# Altium PCB PCB1.PcbDoc
Units mm, origin at the board's own origin, x right, y up, seen from the top; angles counter-clockwise.
Board outline 35.13 x 36.25 mm, 4 copper layers (L1(Signal), L2(GND), L3(GND), L4(Signal)), stack 1.57 mm thick; 35 components, 27 nets, 170 pads, 61 vias.
Unrouted connection lines stored in the file: 2.
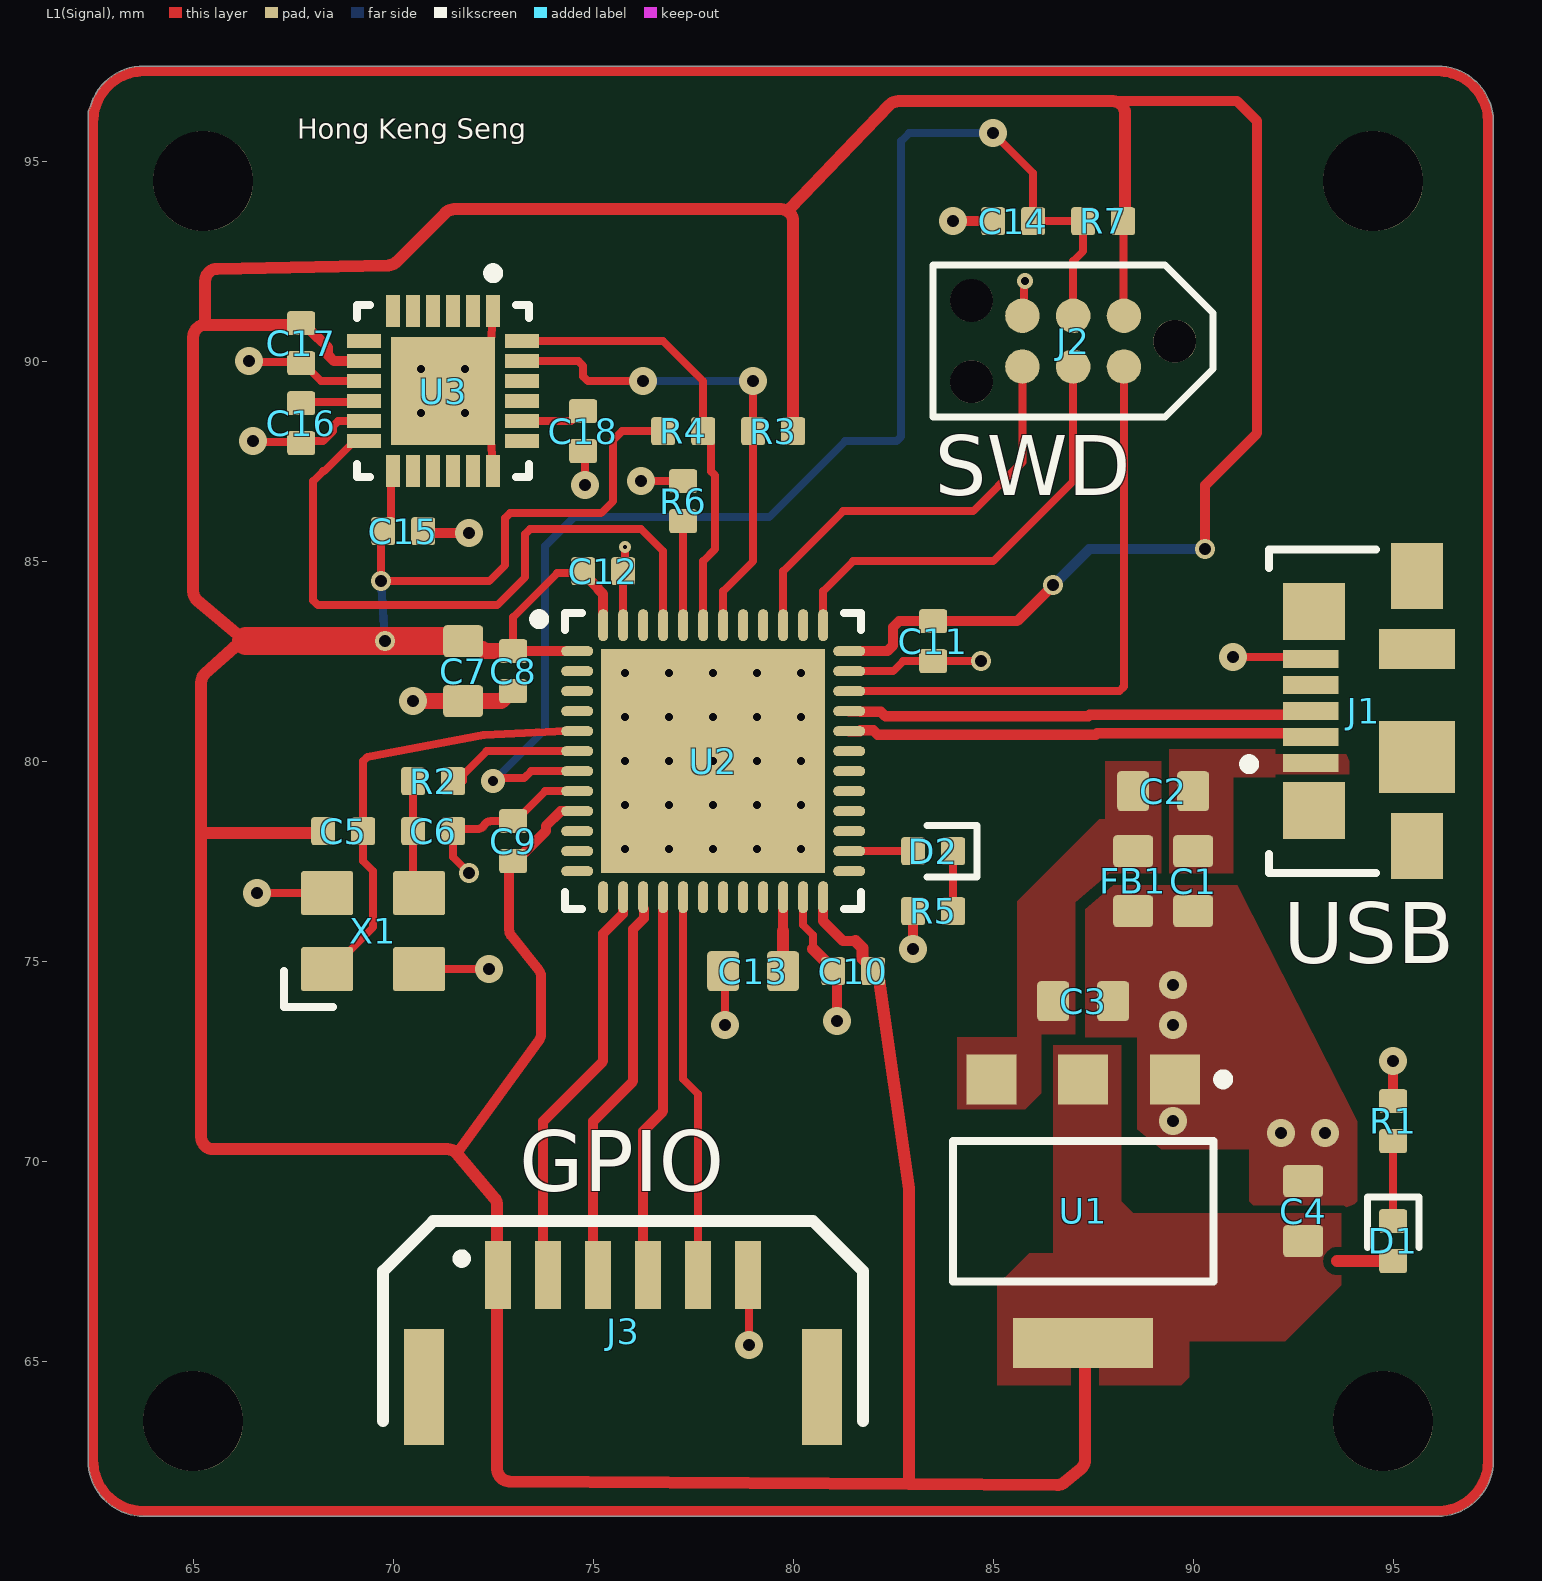
[diagram p0: L1(Signal) view]
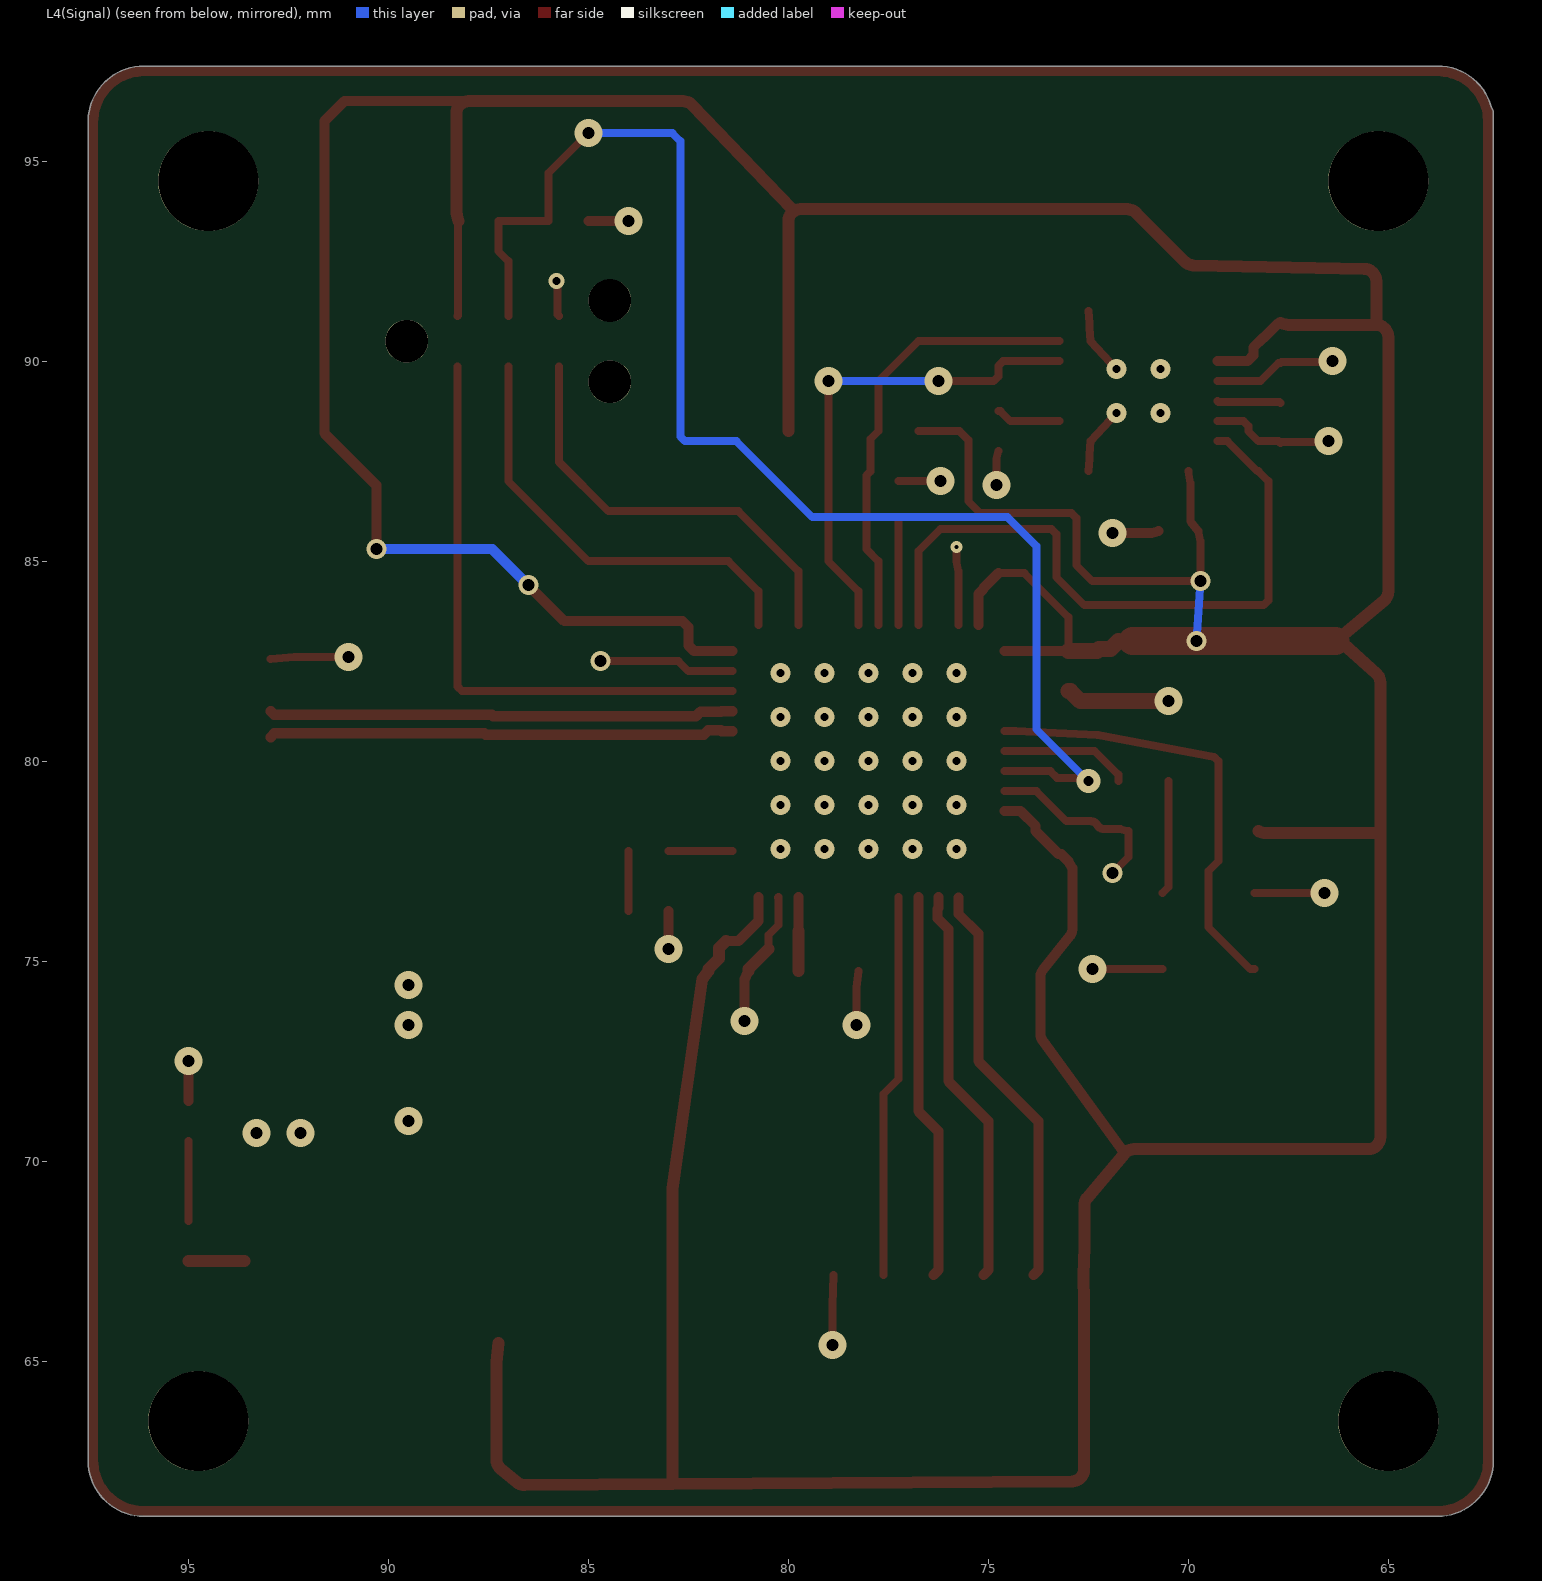
[diagram p1: L4(Signal) view, seen from below]
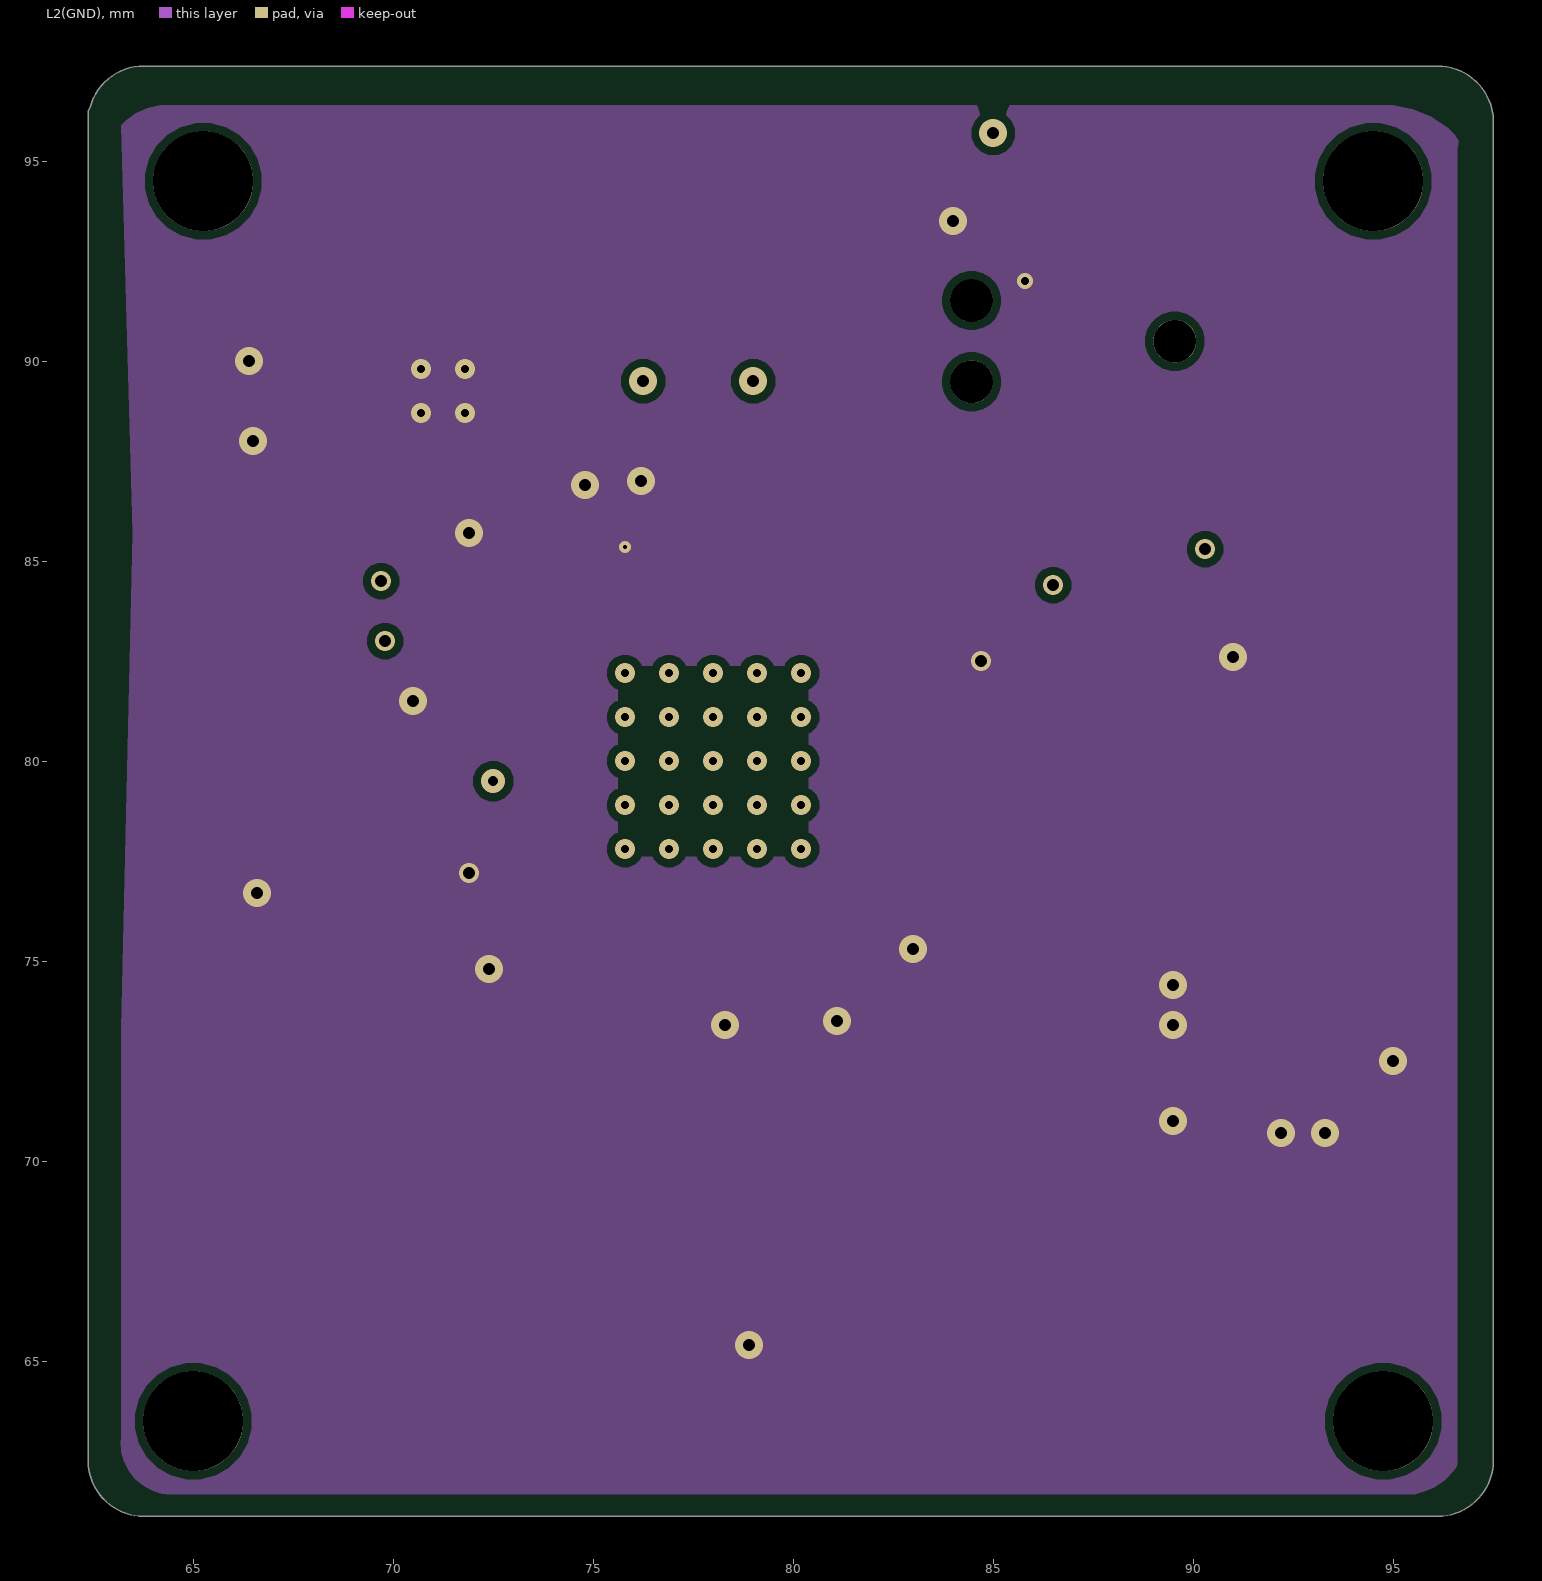
[diagram p2: L2(GND)]
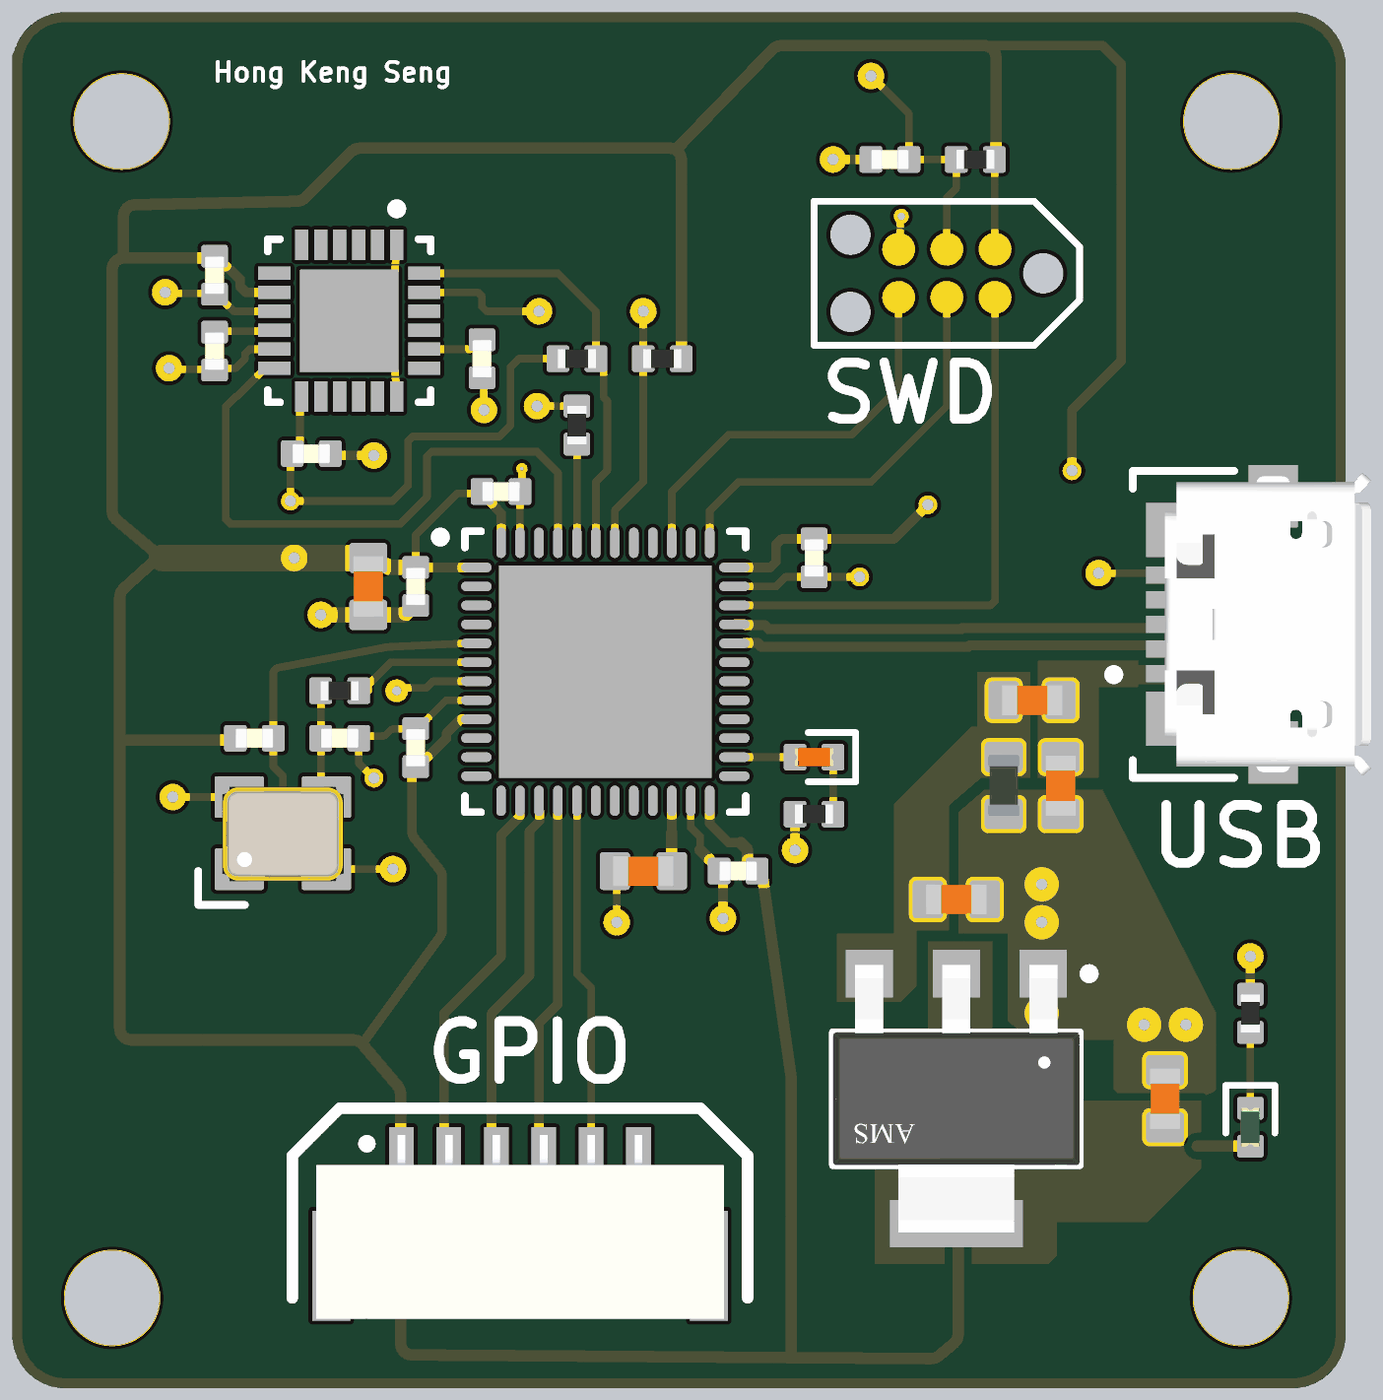
[diagram p3: 3D render of the assembled board from above, using the file's embedded part models]

## Layer stack, top to bottom
Top Solder: solder mask 0.0254, SM-001, Dk 4
L1(Signal): signal copper 0.035
Dielectric 1: prepreg 0.2, PP-017, Dk 4.6
L2(GND): signal copper 0.0175
Dielectric 3: core 1.065, Core-039, Dk 4.6
L3(GND): signal copper 0.0175
Dielectric 5: prepreg 0.2, PP-017, Dk 4.6
L4(Signal): signal copper 0.035
Bottom Solder: solder mask 0.0254, SM-001, Dk 4

## Board outline
62.373,62.52 ccw(c63.77,62.52) 63.77,61.123 96.108,61.123 ccw(c96.108,62.52) 97.505,62.52 97.505,96.128 97.49,96.189 ccw(c96.108,95.98) 96.108,97.377 63.77,97.377 ccw(c63.77,95.98) 62.423,96.351 62.373,96.25

## Design rules (kind name [scope] priority, off if disabled: settings)
Clearance [All] p1: gap=0.2 ignorepadtopadclearanceinfootprint=FALSE
DiffPairsRouting [All] p1: maxlimit=0.254 minlimit=0.203 mostfreqgap=0.254 toplayer_maxgap=0.203 toplayer_prefgap=0.203 toplayer_minwidth=0.26 toplayer_maxwidth=0.26 toplayer_prefwidth=0.26 bottomlayer_maxgap=0.203 bottomlayer_prefgap=0.203 bottomlayer_minwidth=0.26 bottomlayer_maxwidth=0.26 bottomlayer_prefwidth=0.26 impedanceprofiledriven=TRUE impedanceprofileid={DF539FB5-5800-4B12-9F68-A5705F1CF502} impedanceprofilevalue=90.000000 maxuncoupledlength=12.7
PolygonConnect [All] p1: connectstyle=Direct reliefconductorwidth=0.254 reliefentries=4 polygonreliefangle="90 Angle" airgapwidth=0.254
RoutingVias [All] p1: holewidth=0.3 width=0.7 viastyle="Through Hole" minholewidth=0.25 minwidth=0.55 maxholewidth=0.4 maxwidth=0.9
SolderMaskExpansion [All] p1: expansion=0.102 istentingtop=FALSE
SupplyNets "Schematic Supply Nets_3" [InNet('GND')] p1: voltage=0.000
SupplyNets "Schematic Supply Nets_2" [InNet('+5V')] p2: voltage=0.000
SupplyNets "Schematic Supply Nets_1" [InNet('VBUS')] p3: voltage=0.000
SupplyNets "Schematic Supply Nets" [InNet('+3V3')] p4: voltage=0.000
UnRoutedNet [All] p1: checkbadconnections=TRUE
Width [All] p1: maxlimit=1 minlimit=0.2 preferedwidth=0.3 midlayer1_minwidth=0.254 midlayer1_maxwidth=0.254 midlayer1_prefwidth=0.254 midlayer2_minwidth=0.254 midlayer2_maxwidth=0.254 midlayer2_prefwidth=0.254 minimp=50.000000 maximp=50.000000 favimp=50.000000
28 further rules are at their usual default settings.

## Classes and differential pairs
differential pair USB_D: +USB_D_P -USB_D_N

## Components (designator, comment, footprint, x,y, rotation, side; value= is the part's Value field where it differs from the comment)
C1 "2u2" CAP_0603 90,77 r90 top
C2 "2u2" CAP_0603 89.25,79.25 r180 top
C3 "22u" CAP_0603 87.25,74 r180 top
C4 "22u" CAP_0603 92.75,68.75 r270 top
C5 "C0402" CAP_0402 68.75,78.25 r0 top
C6 "C0402" CAP_0402 71,78.25 r180 top
C7 "2u2" CAP_0603 71.75,82.25 r90 top
C8 "100n" CAP_0402 73,82.25 r90 top
C9 "100n" CAP_0402 73,78 r270 top
C10 "100n" CAP_0402 81.5,74.75 r0 top
C11 "100n" CAP_0402 83.5,83 r90 top
C12 "100n" CAP_0402 75.25,84.75 r180 top
C13 "2u2" CAP_0603 79,74.75 r0 top
C14 "100n" CAP_0402 85.5,93.5 r0 top
C15 "100n" CAP_0402 70.25,85.75 r180 top
C16 "100n" CAP_0402 67.7,88.45 r90 top
C17 "10n" CAP_0402 67.7,90.45 r90 top
C18 "2n2" CAP_0402 74.75,88.25 r90 top
D1 "GREEN" LED_0402_GREEN 95,68 r90 top
D2 "RED" LED_0402_RED 83.5,77.75 r0 top
FB1 "120R" FB_0603 88.5,77 r90 top
J1 "473460001" FP-473460001-MFG 95.25,81.25 r90 top
J2 "TC2030-NL" TC2030-NL-FP 87,90.5 r180 top
J3 "SM06B-GHS-TB" SM06B-GHS-TB 75.75,65.75 r0 top
R1 "1k" RES_0402 95,71 r270 top
R2 "0R" RES_0402 71,79.5 r0 top
R3 "2k2" RES_0402 79.5,88.25 r180 top
R4 "2k2" RES_0402 77.25,88.25 r0 top
R5 "1k" RES_0402 83.5,76.25 r0 top
R6 "10k" RES_0402 77.25,86.5 r270 top
R7 "10k" RES_0402 87.75,93.5 r0 top
U1 "AMS1117-3.3" FP-AMS1117-IPC_C 87.25,68.75 r270 top
U2 "STM32F411CEU6" STM-UFQFPN48_L 78,80 r0 top
U3 "MPU-6050" IS-QFN-24_V 71.25,89.25 r270 top
X1 "24MHz" XTAL_3225 69.5,75.75 r0 top

## Footprints (in the part's own frame and the unit in brackets; to place one, negate y for a bottom-side part, rotate by r counter-clockwise, add the part's x,y. Pads: shape width x height; smd on the part's side, far side on the other; paste and mask are expansions set on the pad)
CAP_0402 [mm]
  rrect25% 0.6x0.7 smd: 1(-0.5,0) 2(0.5,0)
  body extent -0.5,-0.26 0.5,0.26, height 0.37
CAP_0603 [mm]
  rrect25% 0.8x1 smd: 1(-0.75,0) 2(0.75,0)
  body extent -0.8,-0.4 0.8,0.4, height 0.51
FB_0603 [mm]
  rrect25% 0.8x1 smd: 1(-0.75,0) 2(0.75,0)
  body extent -0.8,-0.4 0.8,0.4, height 0.81
FP-473460001-MFG [mm]
  rect 0.45x1.38 smd paste+0 mask+0: 1(-1.3,2.31) 2(-0.65,2.31) 3(0,2.31) 4(0.65,2.31) 5(1.3,2.31)
  rect 1.425x1.55 smd paste+0 mask+0: 6(-2.488,2.225) 7(2.488,2.225)
  rect 1.65x1.3 smd paste+0 mask+0: 8(-3.375,-0.35) 11(3.375,-0.35)
  rect 1.8x1.9 smd paste+0 mask+0: 9(-1.15,-0.35)
  rect 1x1.9 smd paste+0 mask+0: 10(1.55,-0.35)
  silkscreen extent -4.05,0.67 4.05,3.97, body extent -4.3,-2.48 4.3,3.45, height 0.25
FP-AMS1117-IPC_C [mm]
  rect 1.25x1.25 smd paste+0 mask+0: 1(-3.295,2.29) 2(-3.295,0) 3(-3.295,-2.29)
  rect 1.25x3.5 smd paste+0 mask+0: 4(3.295,0)
  silkscreen extent -3.42,-3.25 1.75,3.63, body extent -3.9,-3.35 3.9,3.35, height 0.25
IS-QFN-24_V [mm] "QFN, 24-Leads, Body 4x4mm, Pitch 0.5mm, Thermal Pad 2.7x2.6mm"
  rect 0.8x0.35 smd: 1(-2,1.25) 2(-2,0.75) 3(-2,0.25) 4(-2,-0.25) 5(-2,-0.75) 6(-2,-1.25) 13(2,-1.25) 14(2,-0.75) 15(2,-0.25) 16(2,0.25) 17(2,0.75) 18(2,1.25)
  rect 0.35x0.85 smd mask+0.102: 7(-1.25,-1.975) 8(-0.75,-1.975) 9(-0.25,-1.975) 10(0.25,-1.975) 11(0.75,-1.975) 12(1.25,-1.975) 19(1.25,1.975) 20(0.75,1.975) 21(0.25,1.975) 22(-0.25,1.975) 23(-0.75,1.975) 24(-1.25,1.975)
  rect 2.7x2.6 smd: 25(0,0)
  silkscreen extent -3.07,-2.15 2.15,2.15, body extent -2,-2 2,2, height 0.95
LED_0402_GREEN [mm]
  rrect25% 0.6x0.7 smd: A(-0.5,0) K(0.5,0)
  silkscreen extent -0.15,-0.65 1.1,0.65, body extent -0.51,-0.25 0.51,0.25, height 0.45
LED_0402_RED [mm]
  rrect25% 0.6x0.7 smd: A(-0.5,0) K(0.5,0)
  silkscreen extent -0.15,-0.65 1.1,0.65, body extent -0.51,-0.25 0.51,0.25, height 0.45
RES_0402 [mm]
  rrect25% 0.6x0.7 smd: 1(-0.5,0) 2(0.5,0)
  body extent -0.5,-0.25 0.5,0.25, height 0.3
SM06B-GHS-TB [mm]
  rect 0.65x1.7 smd: 1(-3.125,1.4) 2(-1.875,1.4) 3(-0.625,1.4) 4(0.625,1.4) 5(1.875,1.4) 6(3.125,1.4)
  rect 1x2.9 smd: ""(-4.975,-1.4) ""(4.975,-1.4)
  silkscreen extent -6,-2.25 6,2.75, body extent -5.38,-2.8 5.38,2.05, height 4.26
STM-UFQFPN48_L [mm] "QFN, 48-Leads, Body 7.1x7.1mm, Pitch 0.5mm, Thermal Pad 5.6x5.6mm, IPC High Density"
  oval 0.8x0.25 smd: 1(-3.4,2.75) 2(-3.4,2.25) 3(-3.4,1.75) 4(-3.4,1.25) 5(-3.4,0.75) 6(-3.4,0.25) 7(-3.4,-0.25) 8(-3.4,-0.75) 9(-3.4,-1.25) 10(-3.4,-1.75) 11(-3.4,-2.25) 12(-3.4,-2.75) 25(3.4,-2.75) 26(3.4,-2.25) 27(3.4,-1.75) 28(3.4,-1.25) 29(3.4,-0.75) 30(3.4,-0.25) 31(3.4,0.25) 32(3.4,0.75) 33(3.4,1.25) 34(3.4,1.75) 35(3.4,2.25) 36(3.4,2.75)
  oval 0.25x0.8 smd: 13(-2.75,-3.4) 14(-2.25,-3.4) 15(-1.75,-3.4) 16(-1.25,-3.4) 17(-0.75,-3.4) 18(-0.25,-3.4) 19(0.25,-3.4) 20(0.75,-3.4) 21(1.25,-3.4) 22(1.75,-3.4) 23(2.25,-3.4) 24(2.75,-3.4) 37(2.75,3.4) 38(2.25,3.4) 39(1.75,3.4) 40(1.25,3.4) 41(0.75,3.4) 42(0.25,3.4) 43(-0.25,3.4) 44(-0.75,3.4) 45(-1.25,3.4) 46(-1.75,3.4) 47(-2.25,3.4) 48(-2.75,3.4)
  rect 5.6x5.6 smd: 49(0,0)
  silkscreen extent -4.47,-3.7 3.7,3.7, body extent -3.55,-3.55 3.55,3.55, height 0.6
TC2030-NL-FP [mil]
  round 33.98 smd paste-16.99: 1(-50,-25) 2(-50,25) 3(0,-25) 4(0,25) 5(50,-25) 6(50,25)
  round 42.01 hole 42.01 unplated: MH(-100,0) MH(100,-40) MH(100,40)
  silkscreen extent -138,-75 138,75
XTAL_3225 [mm]
  rrect10% 1.3x1.1 smd: 1(-1.15,-0.95) 2(1.15,-0.95) 3(1.15,0.95) 4(-1.15,0.95)
  silkscreen extent -2.23,-1.89 -1,-1, body extent -1.6,-1.28 1.6,1.22, height 0.61

## Part data
C1 C2 C3 C4 C7 C13: library part CAP_0603, "Capacitor SMD 0603"
C5 C6 C8 C9 C10 C11 C12 C14 C15 C16 C17 C18: library part CAP_0402, "Capacitor SMD 0402"
D1: library part LED_0402_GREEN, "LED 0402 GREEN SMD"
D2: library part LED_0402_RED, "LED 0402 RED SMD"
FB1: library part FB_0603, "Ferrite Bead SMD 0603"
J1: library part CMP-2000-05246-2, "CONN RCPT USB2.0 MICRO B SMD R/A", Current Rating=1.8A, Manufacturer=Molex, Package=0, Temperature="-30°C to +85°C", Temperature Range High=+85°C, Temperature Range Low=-30°C, Voltage Rating=30V, Automotive=No, Category=Conn, ComponentLink2Description=Datasheet, ComponentLink2URL=https://www.molex.com/webdocs/datasheets/pdf/en-us/0473460001_IO_CONNECTORS.pdf, Conn Orientation="Right Angle", Contact Material=Gold,Nickel, Device Class L1=Connectors, Device Class L2="USB Connectors", Device Class L3=unset, Digikey Description="CONN RCPT USB2.0 MICRO B SMD R/A", Footprint Url=https://www.molex.com/pdm_docs/sd/473460001_sd.pdf, Height=2.945mm, Is Female=yes, Lead Free=Yes, Manufacturer Part Number=473460001, Number Of Contacts=5, Octopart=https://octopart.com/47346-0001-molex-7164928, Pitch=0.65mm, RoHS=TRUE, Shielding=true, Usb Standard="USB 2.0"
J2: "Tag-Connect No-Solder SWD Debug Connector (No Legs) DO NOT PLACE", Manufacturer=Tag-Connect, Manufacturer Part Number=TC2030-NL-FP
J3: "Header Connector 6 Position 1.25MM Pitch SMD Horizontal JST GH", Manufacturer=JST, Manufacturer Part Number=SM06B-GHS-TB
R1 R2 R3 R4 R5 R6 R7: library part RES_0402, "Resistor SMD 0402"
U1: library part CMP-209535-000001-1, "LDO Voltage Regulators 1A, 3.3V", Dropout Voltage=1.1V, Manufacturer="Advanced Monolithic Systems", Max Junction Temp=+125°C, Max Power Dissipation=1.2W, Max Supply Voltage=15V, Nominal Supply Current=5mA, Output Current=1A, Output Voltage=3.3V, Package=AMS1117, Temperature="-40°C to +125°C", Temperature Range Low=-40°C, Automotive=No, Category=IC, ComponentLink2Description=Datasheet, ComponentLink2URL=http://www.advanced-monolithic.com/pdf/ds1117.pdf, Device Class L1="Integrated Circuits (ICs)", Device Class L2="Power Management ICs", Device Class L3="Voltage Regulators - Linear", Height=1.8mm, Ipc Land Pattern Name=SOT229P700X180-4, Lead Free=Yes, Manufacturer Part Number=AMS1117-3.3, Number Of Outputs=1, Octopart=https://octopart.com/ams1117-3.3-advanced+monolithic+systems-25899300, Output Type=Fixed, RoHS=TRUE, Standoff Height=0.64mm, Temperature Range High=+125°C
U2: library part CMP-0243-00165-1, "ARM Cortex-M4 32-bit MCU+FPU, 512 KB Flash, 128 KB RAM, 36 I/Os, 48-Pin UFQFPN, -40 to 85 degC, Tray", I/Os (High Current)=36, Operating Frequency(F) (Processor speed) (MHz)=100, Package Description=UFQFPN48, Package Reference="48-Pin Ultra Thin Fine Pitch Quad Flat No-Lead, 7 x 7 x 0.6 mm Body, 0.5 mm Pitch, Exposed Pad", Supply Voltage(Vcc) min (V)=1.7, ComponentLink1Description="Manufacturer URL", ComponentLink1URL=http://www.st.com/, ComponentLink2Description=Datasheet, ComponentLink2URL=http://www.st.com/st-web-ui/static/active/en/resource/technical/document/datasheet/DM00115249.pdf, Core="ARM Cortex-M4", DatasheetVersion="Rev. 6", FLASH Size (Prog) (kB)=512, Internal RAM Size (kB)=128, Mounting Technology="Surface Mount", Packing=Tray
U3: library part CMP-1753-00002-2, "3-Axis Gyroscope, Accelerometer and a Digital Motion Processor(TM) (DMP), 2.375 to 3.46 V, -40 to 85 degC, 24-Pin QFN, RoHS, Tape and Reel", Manufacturer=InvenSense, Standard Package=5,000, Category=Sensors,Transducers, Datasheet URL=http://datasheet.octopart.com/MPU-6050-InvenSense-datasheet-14421344.pdf, Datasheet Version="Rev. 3.3, 05/2012", Dynamic Catalog=MPU-6000™Series, Family=Multifunction, Featured Product=MPU-60506-Axis,IntegratedI²CSolution, Manufacturer URL=http://www.invensense.com/, Online Catalog=MPU-6000™Series, Other Names="1428-1007-2 / MPU6050", Output Type=Digital, Sensor Type=MotionTracking, Unit PriceUSD=Digital
X1: library part TSX-3225_24.0000MF15X-AC, "Crystal SMD 24MHz 10PPM 7pF 3225", Manufacturer=Epson, Manufacturer Part Number="TSX-3225 24.0000MF15X-AC"

## Free pads (board coordinates)
  round 2.5 hole 2.5: MH(65,63.5) MH(65.25,94.5) MH(94.5,94.5) MH(94.75,63.5)

## Via types
v1: diameter 0.5, hole 0.2, L1(Signal) to L4(Signal), 29 vias
v2: diameter 0.7, hole 0.3, L1(Signal) to L4(Signal), 23 vias
v3: diameter 0.5, hole 0.3, L1(Signal) to L4(Signal), 6 vias
v4: diameter 0.3, hole 0.1, L1(Signal) to L4(Signal), 1 vias
v5: diameter 0.4, hole 0.2, L1(Signal) to L4(Signal), 1 vias
v6: diameter 0.6/0.6/0.6/0.6 (per signal layer), hole 0.25, L1(Signal) to L4(Signal), 1 vias

## Nets (pads, with @x,y where several pads share a name; then routed paths per layer and width w, separated by ;. In a path a pad name is that pad's centre, name@x,y a point inside that pad or via, vN(x,y) a via of type N, cw(c..) or ccw(c..) an arc to the next point about the centre after c; other vN are vias at no path point)
+3V3: C4.2 C5.1 C7.2 C8.2 C9.2 C10.2 C11.2 C12.2 C15.2 C17.2 D1.A J2.1 J3.1 R3.1 R4.1 R7.2 U1.2 U1.4 U2.1 U2.9 U2.24 U2.36 U2.48 U2.49 U3.8 U3.13 | length 178.9
  L1(Signal) w0.2: U3.13 69.95,86.95 69.95,86 C15.2 69.7,85.5 v3(69.7,84.5) 72.4,84.5 72.8,84.9 72.8,86.083 72.917,86.2 75.2,86.2 75.5,86.5 75.5,88.033 75.717,88.25 R4.1 ; C8.2 73,83.6 74.1,84.7 C12.2@74.75,84.7 ; R7.2 88.26,93.49 88.26,91.145 J2.1
  L1(Signal) w0.25: C17.2@67.75,90.95 68.125,90.575 68.141,90.575 68.375,90.341 68.375,90.146 68.521,90 U3.8 ; 71.59,70.194 73.652,73.034 ccw(c73.45,73.181) 73.7,73.181 73.7,74.612 ccw(c73.45,74.612) 73.646,74.768 ; C8.2 U2.1 ; 73.645,74.768 72.955,75.631 cw(c73.15,75.788) 72.9,75.788 72.9,77.325 C9.2 73.175,77.675 73.241,77.675 73.815,78.249 73.815,78.376 74.189,78.75 U2.9 ; C12.2@74.75,84.7 75.125,84.325 75.125,84.3 75.25,84.175 U2.48 ; U2.24 80.75,76 81.25,75.5 81.562,75.5 ; U2.36 82.354,82.75 82.5,82.896 82.5,83.354 82.646,83.5 C11.2 85.6,83.5 v3(86.5,84.4) ; 87.995,96.5 91.1,96.5 91.6,96 91.6,88.2 90.3,86.9 v3(90.3,85.3)
  L1(Signal) w0.3: 65.107,84.011 cw(c65.3,84.24) 65,84.24 65,90.606 cw(c65.3,90.605) 65.3,90.906 ; 65.108,84.01 66.315,83 ccw(c66.315,82.7) 66.115,82.923 65.299,82.189 ccw(c65.5,81.966) 65.2,81.966 65.2,78.2 ; C17.2 67.5,90.906 65.3,90.906 ; C5.1 68.1,78.2 65.2,78.2 ; 69.879,92.397 65.594,92.306 ccw(c65.6,92.006) 65.3,92.006 65.3,90.906 ; 69.88,92.397 ccw(c69.873,92.697) 70.085,92.485 71.312,93.712 cw(c71.524,93.5) 71.524,93.8 79.7,93.8 cw(c79.7,93.5) 80,93.5 R3.1 ; C7.2@71.4,83 C7.2 ; 71.589,70.195 ccw(c71.361,70) 71.361,70.3 65.5,70.3 cw(c65.5,70.6) 65.2,70.6 65.2,78.2 ; 71.59,70.194 72.529,69.084 cw(c72.3,68.89) 72.6,68.89 72.6,67.85 J3.1 72.601,66.45 72.601,62.298 ccw(c72.901,62.298) 72.899,61.998 82.9,61.927 ; 79.9,93.8 82.411,96.408 cw(c82.628,96.2) 82.628,96.5 87.995,96.5 ; 81.562,75.5 81.738,75.324 81.738,75.062 82,74.8 C10.2 82.15,74.55 82.897,69.318 cw(c82.6,69.275) 82.9,69.275 82.9,61.927 ; U1.4 87.3,64.98 87.3,62.541 cw(c87,62.541) 87.192,62.31 86.784,61.97 cw(c86.592,62.201) 86.591,61.901 82.9,61.927 ; 87.996,96.5 cw(c87.995,96.2) 88.295,96.201 88.295,93.7 R7.2 ; 93.6,67.5 D1.A
  L1(Signal) w0.4: C7.2 71.95,82.8 72.234,82.8 72.284,82.75 C8.2
  L1(Signal) w0.7: 66.315,83 v3(69.8,83) C7.2@71.4,83
  L4(Signal) w0.2: v3(69.7,84.5) v3(69.8,83)
  L4(Signal) w0.25: v3(86.5,84.4) 87.4,85.3 v3(90.3,85.3)
  other v1: 75.8,77.8 76.9,77.8 78,77.8 79.1,77.8 80.2,77.8 75.8,78.9 76.9,78.9 78,78.9 79.1,78.9 80.2,78.9 75.8,80 76.9,80 78,80 79.1,80 80.2,80 75.8,81.1 76.9,81.1 78,81.1 79.1,81.1 80.2,81.1 75.8,82.2 76.9,82.2 78,82.2 79.1,82.2 80.2,82.2
+5V: C2.2 C3.2 FB1.2 U1.3
GND: C1.1 C3.1 C4.1 C6.1 C7.1 C8.1 C9.1 C10.1 C11.1 C12.1 C13.1 C14.1 C15.1 C16.1 C17.1 C18.1 FB1.1 J1.5 J2.5 J3.6 R1.1 R5.1 R6.1 U1.1 U2.8 U2.23 U2.35 U2.47 U3.1 U3.9 U3.11 U3.18 U3.25 X1.2 X1.4 | length 41.1
  L1(Signal) w0.2: v2(66.4,90) 66.425,89.975 67.675,89.975 C17.1 ; v2(66.5,88) 66.525,87.975 67.675,87.975 C16.1 67.75,88 68.25,88 68.5,88.25 68.5,88.383 68.617,88.5 U3.11 ; v2(66.6,76.7) 67.8,76.7 X1.4 ; C17.1@67.75,89.95 68.2,89.5 U3.9 ; X1.2 71.2,74.8 v2(72.4,74.8) ; v1(71.8,88.7) 72.45,88 72.474,87.672 cw(c72.175,87.65) 72.475,87.65 72.475,87.55 U3.18 ; v1(71.8,89.8) 72.45,90.5 72.474,90.828 ccw(c72.175,90.85) 72.475,90.85 72.475,90.95 U3.1 ; v3(71.9,77.2) 71.5,77.6 C6.1 71.7,78.3 72.1,78.3 ccw(c72.1,78.5) 72.273,78.4 cw(c72.446,78.3) 72.445,78.5 C9.1 ; C9.1@73.05,78.5 73.8,79.25 U2.8 ; C18.1 74.8,87.55 v2(74.8,86.9) ; U2.47 C12.1 75.8,85 v4(75.8,85.35) ; v2(76.2,87) 77,87 R6.1 ; C13.1 78.3,74.35 v2(78.3,73.4) ; J3.6 78.9,66.4 v2(78.9,65.4) ; U2.23@80.26,76.59 U2.23 80.25,75.899 80.5,75.649 80.5,75.3 ; U2.35 82.5,82.25 82.75,82.5 C11.1 v3(84.7,82.5) ; J2.5 85.765,91.17 85.765,91.965 v5(85.8,92) ; v2(91,82.6) 92.35,82.6 J1.5
  L1(Signal) w0.25: C15.1 70.925,85.7 v2(71.9,85.7) ; C10.1 81.1,74.525 v2(81.1,73.5) ; v2(83,75.3) 83,76.025 R5.1 ; v2(84,93.5) C14.1 ; R1.1 v2(95,72.5)
  L1(Signal) w0.3: 80.5,75.3 80.99,74.81 C10.1@80.99,74.75
  L1(Signal) w0.4: v2(70.5,81.5) 71.45,81.5 C7.1 72.7,81.5 72.95,81.75 C8.1
  other v1: 70.7,88.7 70.7,89.8
  other v2: 92.2,70.7 93.3,70.7 89.5,71 89.5,73.4 89.5,74.4
"IMU CPOUT": C18.2 U3.20 | length 1.6
  L1(Signal) w0.2: U3.20 74.45,88.5 74.7,88.75 C18.2
"IMU REGOUT": C16.2 U3.10 | length 1.6
  L1(Signal) w0.2: C16.2 67.725,88.975 69.25,88.975 U3.10
IMU_INT: U2.45 U3.12 | length 17
  L1(Signal) w0.2: U3.12 69.025,88 68.275,87.25 68.25,87.25 68,87 68,84.017 68.117,83.9 72.6,83.9 73.3,84.6 73.3,85.683 73.417,85.8 76.2,85.8 76.75,85.25 U2.45
IMU_SCL: R3.2 U2.42 U3.23 | length 12.5
  L1(Signal) w0.2: U3.23 74.633,90 74.75,89.883 74.75,89.617 74.867,89.5 v2(76.25,89.5) ; U2.42 78.25,84.25 79,85 R3.2 v2(79,89.5)
  L4(Signal) w0.2: v2(76.25,89.5) v2(79,89.5)
IMU_SDA: R4.2 U2.43 U3.24 | length 11.3
  L1(Signal) w0.2: U3.24 76.75,90.5 77.75,89.5 R4.2 77.95,88.05 77.95,87.883 ; U2.43 77.75,85 78.051,85.301 78.051,87.141 77.951,87.241 77.951,87.883
"LED PWR K": D1.K R1.2 | length 2
  L1(Signal) w0.2: D1.K R1.2
"MCU BOOT0": R6.2 U2.44 | length 2.6
  L1(Signal) w0.2: U2.44 R6.2
"MCU LED A": D2.A U2.26 | length 1.6
  L1(Signal) w0.2: U2.26 D2.A
"MCU LED K": D2.K R5.2 | length 1.5
  L1(Signal) w0.2: R5.2 D2.K
"MCU OSC IN": C5.2 U2.5 X1.1 | length 11.3
  L1(Signal) w0.2: X1.1 68.45,74.8 69.5,75.85 69.5,77.25 69.25,77.5 C5.2 69.25,80 69.352,80.102 72.257,80.654 72.271,80.655 74.325,80.75 U2.5
"MCU OSC OUT": R2.2 U2.6 | length 3.3
  L1(Signal) w0.2: R2.2@71.75,79.5 71.75,79.661 72.339,80.25 U2.6
"MCU VCAP1": C13.2 U2.22 | length 1.9
  L1(Signal) w0.25: 79.75,75.75 U2.22
  L1(Signal) w0.3: C13.2 79.75,75.75
MCU_NRST: C14.2 J2.3 R7.1 U2.7 | length 34.8
  L1(Signal) w0.2: v6(72.5,79.5) 72.577,79.577 73.277,79.577 73.45,79.75 U2.7 ; v2(85,95.7) 86,94.7 C14.2 R7.1 87.25,92.75 87,92.5 J2.3
  L4(Signal) w0.2: v6(72.5,79.5) 73.8,80.8 73.8,85.383 74.517,86.1 79.4,86.1 81.3,88 82.583,88 82.7,88.117 82.7,95.5 82.9,95.7 v2(85,95.7)
MCU_PA4: J3.2 U2.14 | length 10.3
  L1(Signal) w0.25: J3.2 73.75,67.275 73.75,71 75.25,72.5 75.25,75.689 75.741,76.18 75.741,76.317 75.75,76.325 U2.14@75.75,76.592
MCU_PA5: J3.3 U2.15 | length 10
  L1(Signal) w0.25: J3.3 75,67.275 75,71 76,72 76,75.802 76.27,76.072 76.27,76.305 76.25,76.325 U2.15
MCU_PA6: J3.4 U2.16 | length 9.7
  L1(Signal) w0.25: J3.4 76.25,67.275 76.25,70.75 76.75,71.25 U2.16
MCU_PA7: J3.5 U2.17 | length 9.6
  L1(Signal) w0.2: U2.17 77.25,72.05 77.625,71.675 J3.5
MCU_SWCLK: J2.4 U2.37 | length 11.1
  L1(Signal) w0.2: U2.37 80.75,84.25 81.5,85 85,85 87,87 J2.4
MCU_SWDIO: J2.2 U2.34 | length 14.9
  L1(Signal) w0.2: U2.34 88.153,81.75 88.27,81.867 J2.2
MCU_SWO: J2.6 U2.39 | length 10.8
  L1(Signal) w0.2: U2.39 79.75,84.75 81.25,86.25 84.5,86.25 85.73,87.48 J2.6
USB_D_N: J1.2 U2.32 | length 11.6
  L1(Signal) w0.26: U2.32 81.665,80.75 81.683,80.768 82.004,80.768 82.115,80.657 87.565,80.657 87.602,80.693 92.847,80.693 J1.2
USB_D_P: J1.3 U2.33 | length 11.6
  L1(Signal) w0.26: U2.33 81.665,81.25 81.683,81.232 82.195,81.232 82.307,81.12 87.374,81.12 87.41,81.157 92.847,81.157 J1.3
VBUS: C1.2 C2.1 J1.1
"XTAL IN": C6.2 R2.1 X1.3 | length 2.9
  L1(Signal) w0.2: R2.1 C6.2 70.5,76.85 X1.3
pads on no net: J1.4 J1.6 J1.7 J1.8 J1.9 J1.10 J1.11 J2.MH J3. U2.2 U2.3 U2.4 U2.10 U2.11 U2.12 U2.13 U2.18 U2.19 U2.20 U2.21 U2.25 U2.27 U2.28 U2.29 U2.30 U2.31 U2.38 U2.40 U2.41 U2.46 U3.2 U3.3 U3.4 U3.5 U3.6 U3.7 U3.14 U3.15 U3.16 U3.17 U3.19 U3.21 U3.22
copper on no net: | length 140
  L1(Signal) w0.254: 62.5,95.98 cw(c63.77,95.98) 63.77,97.25 96.108,97.25 cw(c96.108,95.98) 97.378,95.98 ; 62.5,96.25 62.5,62.52 ccw(c63.77,62.52) 63.77,61.25 96.108,61.25 ccw(c96.108,62.52) 97.378,62.52 97.378,96.128

## Polygon pours and split planes (outlines as drawn)
+3V3 on L1(Signal) "+3V3_L01_P003" (solid, pour order 3): 85.1,64.4 89.7,64.4 89.9,64.6 89.9,65.5 92.3,65.5 93.7,66.9 93.7,68.7 88.5,68.7 88.2,69 88.2,72.9 86.5,72.9 86.5,67.7 85.9,67.7 85.1,66.9 85.1,65.5
GND on L1(Signal) "GND_L01_P009" (solid, pour order 9): 91.1,76.9 88,76.9 87.3,76.3 87.3,73.1 88.6,73.1 88.6,70.8 89.2,70.3 91.4,70.3 91.4,69 91.6,68.8 93.9,68.8 94.1,69 94.1,71
+5V on L1(Signal) "+5V_L01_P001" (solid, pour order 1): 87.8,78.55 87.65,78.55 85.6,76.5 85.6,73.1 84.1,73.1 84.1,71.3 85.8,71.3 86.2,71.7 86.2,73.176 87.054,73.176 87.054,76.475 87.9,77.2 89.2,77.2 89.2,80 87.8,80
VBUS on L1(Signal) "VBUS_L01_P000" (solid, pour order 0): 89.4,80.3 89.4,77.2 91,77.2 91,79.6 93.9,79.6 93.9,80.3
GND on L2(GND) "GND_L02_P004" (solid, pour order 4): 63.494,85.698 63.2,95.9 cw(c64.366,94.793) 64.324,96.4 94.748,96.4 cw(c94.748,93.86) 96.544,95.656 96.7,95.5 ccw(c96.941,95.259) 96.6,95.259 96.6,62.4 cw(c95.204,63.301) 95.554,61.677 64.324,61.677 cw(c64.474,62.951) 63.2,63.1 63.2,73.295

## Silkscreen, mask and mechanical layers (free items; w line width, h text height)
Top Overlay:
  text "Hong Keng Seng" at 67.6,95.567 h0.5
  text "SWD" at 83.545,86.645 h1.5
  text "USB" at 92.254,74.954 h1.52
  text "GPIO" at 73.154,69.254 h1.52

## Text inside footprints (layer, text, board x,y; h text height)
D1: Mechanical 13 "+" at 94.492,66.117 h0.5 r90
D2: Mechanical 13 "+" at 81.617,78.258 h0.5